# Altium PCB PCB1.PcbDoc
Units mm, origin at the board's own origin, x right, y up, seen from the top; angles counter-clockwise.
Board outline 100 x 50 mm, 2 copper layers (Top Layer, Bottom Layer); 69 components, 53 nets, 216 pads, 70 vias.
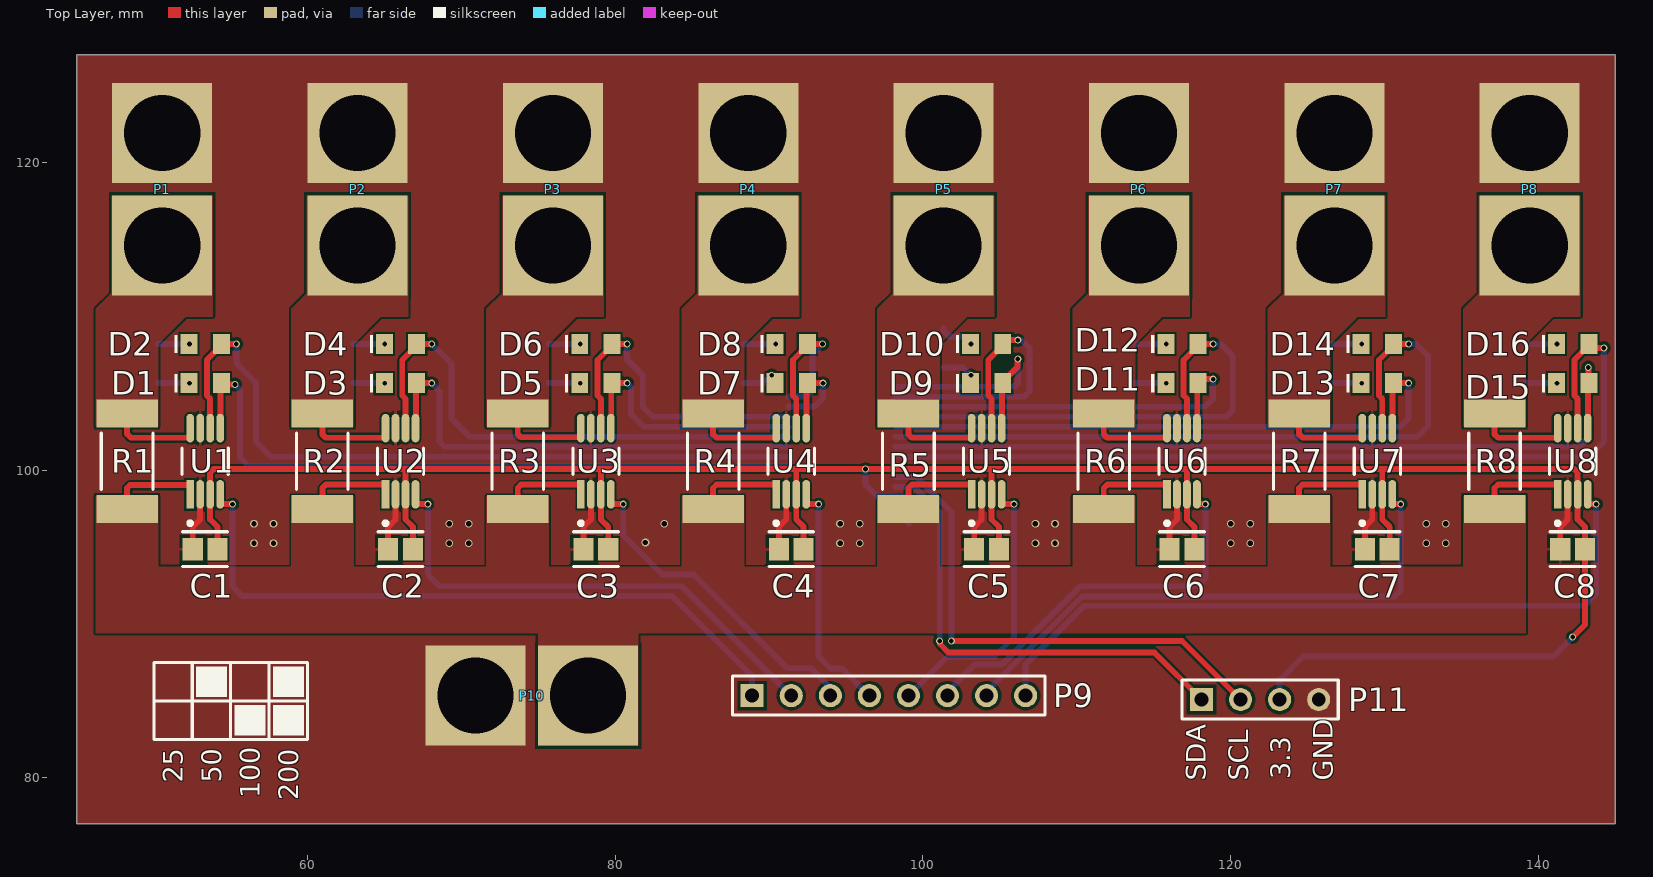
[diagram p0: Top Layer view]
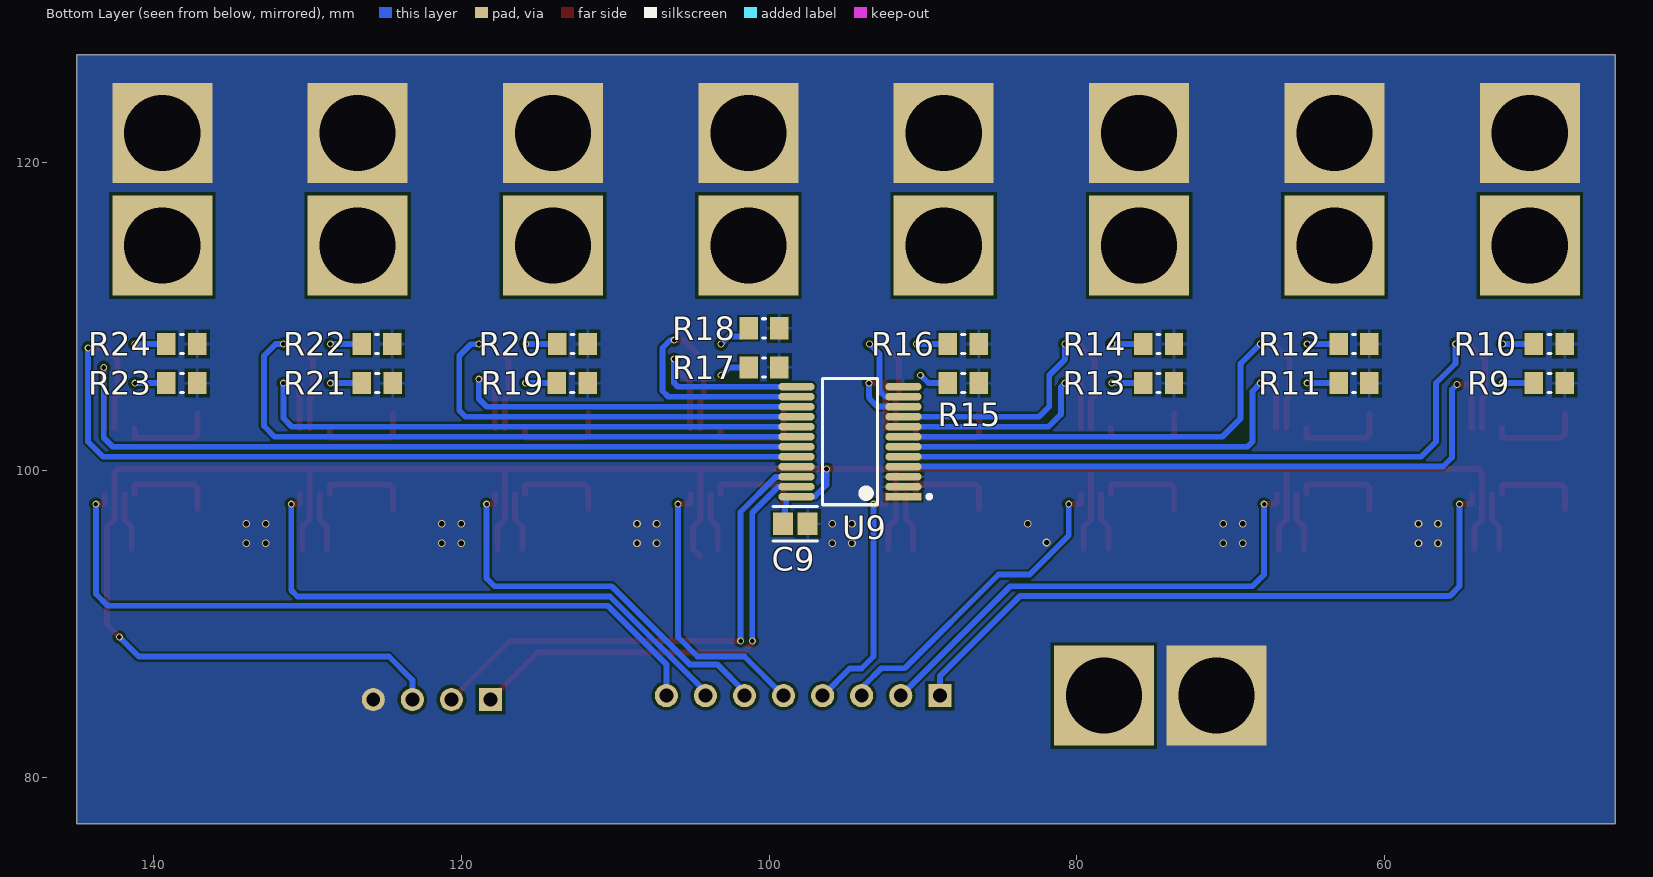
[diagram p1: Bottom Layer view, seen from below]
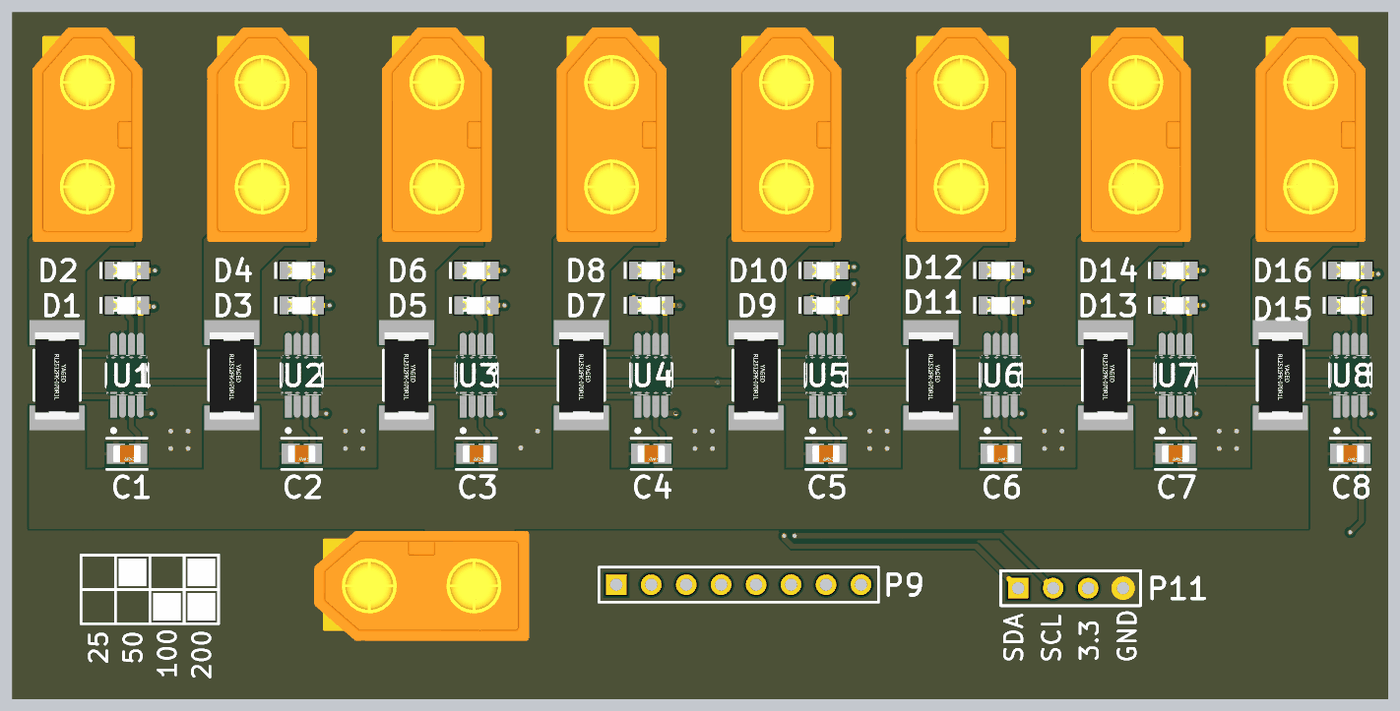
[diagram p2: 3D render of the assembled board from above, using the file's embedded part models]
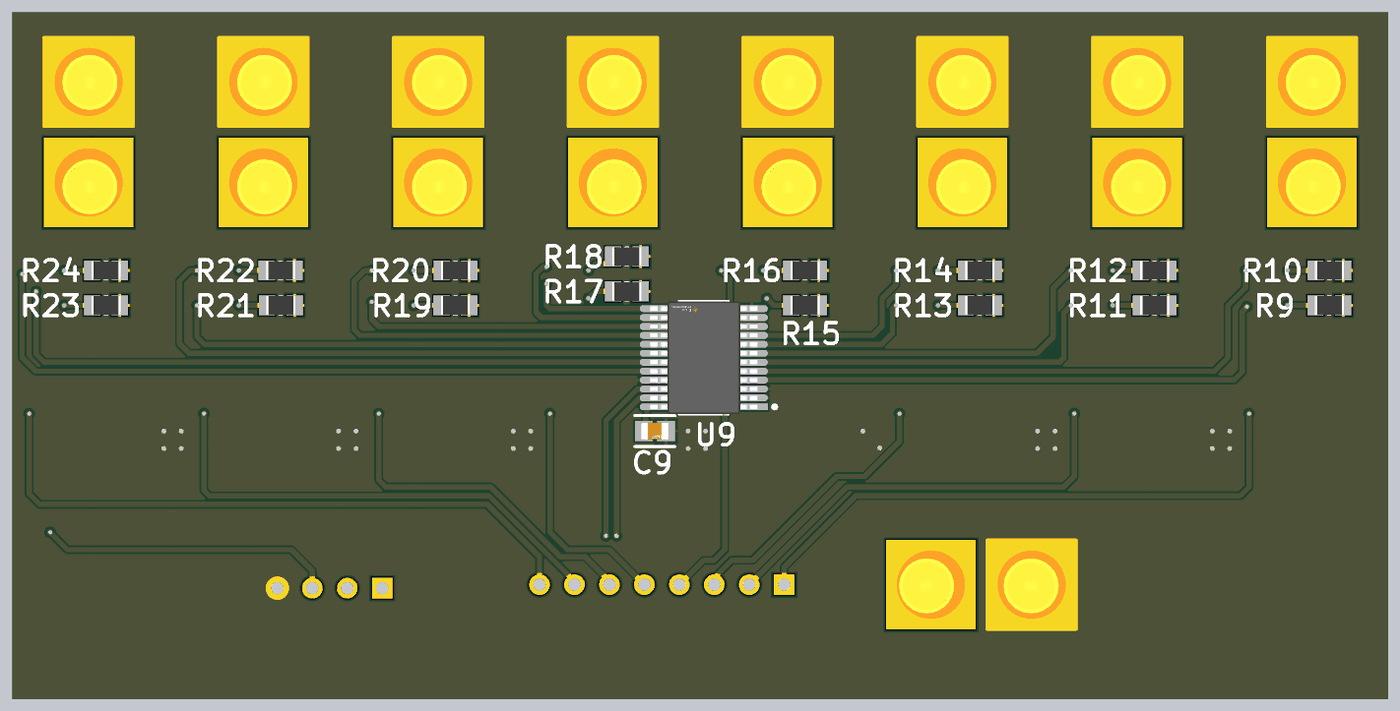
[diagram p3: 3D render of the assembled board from below, using the file's embedded part models]

## Layer stack, top to bottom
Top Solder: solder mask 0.0102, Solder Resist, Dk 3.5
Top Layer: signal copper 0.0356
Dielectric 1: dielectric 0.32, FR-4, Dk 4.8
Bottom Layer: signal copper 0.0356
Bottom Solder: solder mask 0.0102, Solder Resist, Dk 3.5

## Board outline
45,77 45,127 145,127 145,77

## Design rules (kind name [scope] priority, off if disabled: settings)
Clearance Clearance_POWER [(InNet('NetC205_2') OR InNet('NETC203_2') OR InNet('NETC206_2') OR InNet('NetP410_1') OR InNet('NetP410_3') OR InNet('VM'))] p1: gap=0.254 ignorepadtopadclearanceinfootprint=FALSE except(0: SMDPad-Hole THPad-Hole Via-Hole Fill-Hole Poly-Hole Region-Hole Text-Hole; 0.1: Arc-Arc Arc-Track Track-Track; 0.127: Arc-THPad Arc-Fill Arc-Poly Arc-Region Track-THPad Track-Fill Track-Poly Track-Region SMDPad-SMDPad; 0.2: Arc-SMDPad Track-SMDPad; 0.5: THPad-THPad THPad-Fill THPad-Poly THPad-Region Fill-Fill Fill-Poly Fill-Region Poly-Poly Poly-Region Region-Region)
Clearance [All] p2: gap=0.127 ignorepadtopadclearanceinfootprint=FALSE except(0: SMDPad-Hole THPad-Hole Via-Hole Fill-Hole Poly-Hole Region-Hole Text-Hole; 0.1: Arc-Arc Arc-Track Track-Track; 0.2: Arc-SMDPad Track-SMDPad THPad-Fill THPad-Poly THPad-Region Via-Fill Via-Poly Via-Region; 0.254: Arc-Via Arc-Text Arc-Hole Track-Via Track-Text Track-Hole SMDPad-THPad SMDPad-Via SMDPad-Text THPad-Via THPad-Text Via-Via Via-Text Fill-Text Poly-Text Region-Text Text-Text; 0.5: THPad-THPad)
ComponentClearance [All] p1: gap=0.127 collisioncheckmode=3 verticalgap=0.254 showdistances=FALSE
HoleSize [All] p1: absolutevalues=TRUE maxlimit=6.5 minlimit=0.025 maxpercent=80.000 minpercent=20.000
MinimumSolderMaskSliver [All] p1: minsoldermaskwidth=0.08
PlaneClearance [All] p1: clearance=0.2
PlaneConnect [All] p1: planeconnectstyle=Direct reliefexpansion=0.508 reliefentries=4 reliefconductorwidth=0.254 reliefairgap=0.254
PolygonConnect PolygonConnect_GND_POWER [InNet('GND') vs (HasFootprint('FP-FC-G-MFG') OR HasFootprint('FP-CL32-IPC_B') OR HasFootprint('TSON Advance_TOS') OR HasFootprint('XT60+MR60') OR HasFootprint('XT-60') OR HasFootprint('FP-SMAJ-CA-MFG') OR InNamedPolygon('GND_L01_P000'))] p1: connectstyle=Direct reliefconductorwidth=0.254 reliefentries=4 polygonreliefangle="90 Angle" airgapwidth=0.254
PolygonConnect PolygonConnect_GND [InNet('GND')] p2: thpad.connectstyle=Direct thpad.reliefconductorwidth=0.254 thpad.reliefentries=4 thpad.polygonreliefangle="90 Angle" thpad.airgapwidth=0.254 smdpad.connectstyle=Relief smdpad.reliefconductorwidth=0.2 smdpad.reliefentries=4 smdpad.polygonreliefangle="90 Angle" smdpad.airgapwidth=0.2 via.connectstyle=Direct via.reliefconductorwidth=0.254 via.reliefentries=4 via.polygonreliefangle="90 Angle" via.airgapwidth=0.254
PolygonConnect [All] p3: connectstyle=Direct reliefconductorwidth=0.254 reliefentries=4 polygonreliefangle="90 Angle" airgapwidth=0.254
RoutingVias [All] p1: holewidth=0.3 width=0.45 viastyle="Through Hole" minholewidth=0.3 minwidth=0.45 maxholewidth=0.55 maxwidth=0.7
SilkToSilkClearance [All] p1: silktosilkclearance=0
SilkToSolderMaskClearance [IsPad] p1: minsilkscreentomaskgap=0.15 clearancetoexposedcopper=TRUE
SolderMaskExpansion [All] p1: expansion=0.1 istentingtop=FALSE
Width Width_voltage [InNetClass('Voltage')] p1: maxlimit=0.5 minlimit=0.18 preferedwidth=0.18 minimp=50.000000 maximp=50.000000 favimp=50.000000
Width [All] p2: maxlimit=5.08 minlimit=0.127 preferedwidth=0.18 minimp=50.000000 maximp=50.000000 favimp=50.000000
23 further rules are at their usual default settings.

## Components (designator, comment, footprint, x,y, rotation, side; value= is the part's Value field where it differs from the comment)
C1 "08051C104KAT2A" FP-0805-L_2_01_0_2-W_1_25-IPC_B 53.34,94.869 r0 top
C2 "08051C104KAT2A" FP-0805-L_2_01_0_2-W_1_25-IPC_B 66.04,94.869 r0 top
C3 "08051C104KAT2A" FP-0805-L_2_01_0_2-W_1_25-IPC_B 78.74,94.869 r0 top
C4 "08051C104KAT2A" FP-0805-L_2_01_0_2-W_1_25-IPC_B 91.44,94.869 r0 top
C5 "08051C104KAT2A" FP-0805-L_2_01_0_2-W_1_25-IPC_B 104.14,94.869 r0 top
C6 "08051C104KAT2A" FP-0805-L_2_01_0_2-W_1_25-IPC_B 116.84,94.869 r0 top
C7 "08051C104KAT2A" FP-0805-L_2_01_0_2-W_1_25-IPC_B 129.54,94.869 r0 top
C8 "08051C104KAT2A" FP-0805-L_2_01_0_2-W_1_25-IPC_B 142.24,94.869 r0 top
C9 "08051C104KAT2A" FP-0805-L_2_01_0_2-W_1_25-IPC_B 98.298,96.52 r180 bottom
D1 "150080SS75000" WL-SMCW_0805_150080xx75000 53.34,105.664 r0 top
D2 "150080SS75000" WL-SMCW_0805_150080xx75000 53.34,108.204 r0 top
D3 "150080SS75000" WL-SMCW_0805_150080xx75000 66.04,105.664 r0 top
D4 "150080SS75000" WL-SMCW_0805_150080xx75000 66.04,108.204 r0 top
D5 "150080SS75000" WL-SMCW_0805_150080xx75000 78.74,105.664 r0 top
D6 "150080SS75000" WL-SMCW_0805_150080xx75000 78.74,108.204 r0 top
D7 "150080SS75000" WL-SMCW_0805_150080xx75000 91.44,105.664 r0 top
D8 "150080SS75000" WL-SMCW_0805_150080xx75000 91.44,108.204 r0 top
D9 "150080SS75000" WL-SMCW_0805_150080xx75000 104.14,105.664 r0 top
D10 "150080SS75000" WL-SMCW_0805_150080xx75000 104.14,108.204 r0 top
D11 "150080SS75000" WL-SMCW_0805_150080xx75000 116.84,105.664 r0 top
D12 "150080SS75000" WL-SMCW_0805_150080xx75000 116.84,108.204 r0 top
D13 "150080SS75000" WL-SMCW_0805_150080xx75000 129.54,105.664 r0 top
D14 "150080SS75000" WL-SMCW_0805_150080xx75000 129.54,108.204 r0 top
D15 "150080SS75000" WL-SMCW_0805_150080xx75000 142.24,105.664 r0 top
D16 "150080SS75000" WL-SMCW_0805_150080xx75000 142.24,108.204 r0 top
P1 "XT-60 Connector" 2 54.585,110.211 r90 top
P2 "XT-60 Connector" 2 67.285,110.211 r90 top
P3 "XT-60 Connector" 2 79.985,110.211 r90 top
P4 "XT-60 Connector" 2 92.685,110.211 r90 top
P5 "XT-60 Connector" 2 105.385,110.211 r90 top
P6 "XT-60 Connector" 2 118.085,110.211 r90 top
P7 "XT-60 Connector" 2 130.785,110.211 r90 top
P8 "XT-60 Connector" 2 143.485,110.211 r90 top
P9 "Header 8" HDR1X8 88.9,85.344 r0 top
P10 "XT-60 Connector" 2 82.626,89.383 r180 top
P11 "Header 4" HDR1X4 118.11,85.09 r0 top
R1 "RL2512FK-070R1L" FP-RL2512-MFG 48.26,100.584 r270 top value=100mΩ
R2 "RL2512FK-070R1L" FP-RL2512-MFG 60.96,100.584 r270 top value=100mΩ
R3 "RL2512FK-070R1L" FP-RL2512-MFG 73.66,100.584 r270 top value=100mΩ
R4 "RL2512FK-070R1L" FP-RL2512-MFG 86.36,100.584 r270 top value=100mΩ
R5 "RL2512FK-070R1L" FP-RL2512-MFG 99.06,100.584 r270 top value=100mΩ
R6 "RL2512FK-070R1L" FP-RL2512-MFG 111.76,100.584 r270 top value=100mΩ
R7 "RL2512FK-070R1L" FP-RL2512-MFG 124.46,100.584 r270 top value=100mΩ
R8 "RL2512FK-070R1L" FP-RL2512-MFG 137.16,100.584 r270 top value=100mΩ
R9 "1K" RESC2013X60X35ML10T20 49.276,105.664 r0 bottom
R10 "1K" RESC2013X60X35ML10T20 49.276,108.204 r0 bottom
R11 "1K" RESC2013X60X35ML10T20 61.976,105.664 r0 bottom
R12 "1K" RESC2013X60X35ML10T20 61.976,108.204 r0 bottom
R13 "1K" RESC2013X60X35ML10T20 74.676,105.664 r0 bottom
R14 "1K" RESC2013X60X35ML10T20 74.676,108.204 r0 bottom
R15 "1K" RESC2013X60X35ML10T20 87.376,105.664 r0 bottom
R16 "1K" RESC2013X60X35ML10T20 87.376,108.204 r0 bottom
R17 "1K" RESC2013X60X35ML10T20 100.33,106.68 r0 bottom
R18 "1K" RESC2013X60X35ML10T20 100.33,109.22 r0 bottom
R19 "1K" RESC2013X60X35ML10T20 112.792,105.664 r0 bottom
R20 "1K" RESC2013X60X35ML10T20 112.776,108.204 r0 bottom
R21 "1K" RESC2013X60X35ML10T20 125.476,105.664 r0 bottom
R22 "1K" RESC2013X60X35ML10T20 125.492,108.204 r0 bottom
R23 "1K" RESC2013X60X35ML10T20 138.176,105.664 r0 bottom
R24 "1K" RESC2013X60X35ML10T20 138.176,108.204 r0 bottom
U1 "INA225AIDGKT" FP-INA225AIDGKT-IPC_A 53.34,100.584 r90 top
U2 "INA225AIDGKT" FP-INA225AIDGKT-IPC_A 66.04,100.584 r90 top
U3 "INA225AIDGKT" FP-INA225AIDGKT-IPC_A 78.74,100.584 r90 top
U4 "INA225AIDGKT" FP-INA225AIDGKT-IPC_A 91.44,100.584 r90 top
U5 "INA225AIDGKT" FP-INA225AIDGKT-IPC_A 104.14,100.584 r90 top
U6 "INA225AIDGKT" FP-INA225AIDGKT-IPC_A 116.84,100.584 r90 top
U7 "INA225AIDGKT" FP-INA225AIDGKT-IPC_A 129.54,100.584 r90 top
U8 "INA225AIDGKT" FP-INA225AIDGKT-IPC_A 142.24,100.584 r90 top
U9 "TCA9555DBR" FP-DB0024A-IPC_A 94.742,101.854 r0 bottom

## Footprints (in the part's own frame and the unit in brackets; to place one, negate y for a bottom-side part, rotate by r counter-clockwise, add the part's x,y. Pads: shape width x height; smd on the part's side, far side on the other; paste and mask are expansions set on the pad)
2 [mm] "Battery Connector"
  rect 6.5x6.5 hole 4.95: 1(4.394,4.039) 2(11.709,4.039)
  body extent 0.07,0.13 15.67,8.13, height 16.4
FP-0805-L_2_01_0_2-W_1_25-IPC_B [mm]
  rect 1.305x1.456 smd paste+0 mask+0: 1(-0.806,0) 2(0.806,0)
  silkscreen extent -1.46,-1.13 1.46,1.13, body extent -1.71,-0.98 1.71,0.98, height 0.25
FP-DB0024A-IPC_A [mm]
  rect 2.353x0.495 smd paste+0 mask+0: 1(-3.475,3.575)
  rrect100% 2.353x0.495 smd paste+0 mask+0: 2(-3.475,2.925) 3(-3.475,2.275) 4(-3.475,1.625) 5(-3.475,0.975) 6(-3.475,0.325) 7(-3.475,-0.325) 8(-3.475,-0.975) 9(-3.475,-1.625) 10(-3.475,-2.275) 11(-3.475,-2.925) 12(-3.475,-3.575) 13(3.475,-3.575) 14(3.475,-2.925) 15(3.475,-2.275) 16(3.475,-1.625) 17(3.475,-0.975) 18(3.475,-0.325) 19(3.475,0.325) 20(3.475,0.975) 21(3.475,1.625) 22(3.475,2.275) 23(3.475,2.925) 24(3.475,3.575)
  silkscreen extent -5.28,-4.1 1.8,4.1, body extent -3.9,-4.1 3.9,4.1, height 2
FP-INA225AIDGKT-IPC_A [mm]
  rect 1.857x0.498 smd paste+0 mask+0: 1(-2.151,0.975)
  rrect100% 1.857x0.498 smd paste+0 mask+0: 2(-2.151,0.325) 3(-2.151,-0.325) 4(-2.151,-0.975) 5(2.151,-0.975) 6(2.151,-0.325) 7(2.151,0.325) 8(2.151,0.975)
  silkscreen extent -4.15,-1.5 0.85,1.5, body extent -3.58,-2 3.58,2, height 0.25
FP-RL2512-MFG [mm]
  rect 1.8x4 smd paste+0 mask+0: 1(-3.1,0) 2(3.1,0)
  silkscreen extent -1.83,-1.68 1.83,1.68, body extent -4.1,-2.1 4.1,2.1, height 0.25
HDR1X4 [mm] "Connector; Header; 4 Position"
  rect 1.5x1.5 hole 0.9: 1(0,0)
  round 1.5 hole 0.9: 2(2.54,0) 3(5.08,0) 4(7.62,0)
  silkscreen extent -1.27,-1.27 8.89,1.27
HDR1X8 [mm] "Connector; Header; 8 Position"
  rect 1.5x1.5 hole 0.9: 1(0,0)
  round 1.5 hole 0.9: 2(2.54,0) 3(5.08,0) 4(7.62,0) 5(10.16,0) 6(12.7,0) 7(15.24,0) 8(17.78,0)
  silkscreen extent -1.27,-1.27 19.05,1.27
RESC2013X60X35ML10T20 [mm] "Chip Resistor, 2-Leads, Body 2.1x1.35mm, IPC Low Density"
  rect 1.2x1.45 smd: 1(-1,0) 2(1,0)
  silkscreen extent -0.1,-0.63 0.1,0.63, body extent -1.05,-0.68 1.05,0.67, height 0.6
WL-SMCW_0805_150080xx75000 [mm] "SMD Mono-color Chip LED, body 2.0x1.25mm"
  rect 1.1x1.3 smd: 1(-1.05,0) 2(1.05,0)
  silkscreen extent -2,-0.6 -1.8,0.6, body extent -1,-0.63 1,0.62, height 0.7

## Part data
C1 C2 C3 C4 C5 C6 C7 C8 C9: library part CMP-2007-04174-2, "General Purpose Ceramic Capacitor, 0805, 100nF, 10%, X7R, 15%, 100V", Capacitance=100nF, Case Code (Imperial)=0805, Case Code (Metric)=2012, Dielectric=X7R, Dielectric Material=Ceramic, Max Operating Temperature=125°C, Min Operating Temperature=-55°C, Package Quantity=2000, Tolerance=10%, Voltage=100V, Case/Package=0805, Construction=Flat, Contact Plating=Tin, Depth=1.25mm, Height=1.4mm, Lead Free="Lead Free", Length=2.01mm, Mount="Surface Mount", Number of Pins=2, Packaging="Tape and Reel", Radiation Hardening=No, REACH SVHC="No SVHC", RoHS Compliant=Yes, Series=-, Termination=SMD/SMT, Thickness=0.055inch, Voltage Rating=100V, Voltage Rating (DC)=100V, Width=0.049inch
D1 D2 D3 D4 D5 D6 D7 D8 D9 D10 D11 D12 D13 D14 D15 D16: library part CMP-1426-00010-3, Case Code (Imperial)=0805, Case Code (Metric)=2012, Color=Red, Forward Current=100mA, Forward Voltage=1.9V, Max Junction Temperature (Tj)=95°C, Max Operating Temperature=85°C, Max Reverse Voltage (DC)=5V, Min Operating Temperature=-40°C, Power Dissipation=72mW, Test Current=20mA, Case/Package=0805, Dominant Wavelength=630nm, Height=700µm, Length=2mm, Lens Style="Clear, Rectangular", Luminous Intensity=60mcd, Mount="Surface Mount", NexarPartId=29717782, Packaging="Tape and Reel", Peak Wavelength=645nm, REACH SVHC=Unknown, Reverse Voltage=5V, RoHS=Compliant, Viewing Angle=140°, Wavelength=630nm, Width=1.25mm
P1 P2 P3 P4 P5 P6 P7 P8 P10: Colour=yellow, Manufacturer=POLOLU, Manufacturer Part Number="XT60 YELLOW", Maximum current=65A, Category="Power Supply Modules", ComponentLink1Description=http://static.tme.eu/products_pics/8/b/5/8b5040a8a5baf3e0e67386c2e3a9b903/913.jpg, ComponentLink1URL=http://static.tme.eu/products_pics/8/b/5/8b5040a8a5baf3e0e67386c2e3a9b903/913.jpg, Information="Product is not a working device, but only component", MinAmount=1, Multiples=1, Number of Pins=2, Price Type=NET, Pricing 1="1=2.08, 10=1.95 (USD)", Stock 1=29, SuppliedAmount=0, Supplier 1=TME, Supplier Part Number 1="XT-60 Connector", Type of robotics accessories="power connector", Unit=pcs, Weight=7.267
P9: "Header, 8-Pin", LatestRevisionDate=17-Jul-2002, LatestRevisionNote="Re-released for DXP Platform.", Publisher="Altium Limited"
P11: "Header, 4-Pin", LatestRevisionDate=17-Jul-2002, LatestRevisionNote="Re-released for DXP Platform.", Publisher="Altium Limited"
R1 R2 R3 R4 R5 R6 R7 R8: library part CMP-03412-013102-1, "RES 0.1 OHM 1% 1W 2512", Manufacturer=YAGEO, Package=RL2512, Power Rating=1W, Resistance=100mΩ, Temperature="-55°C to +155°C", Temperature Coefficient=600ppm/°C, Temperature Range High=+155°C, Temperature Range Low=-55°C, Tolerance=1%, Automotive=Yes, Automotive Grade="Grade 0", Category=Res, ComponentLink2Description=Datasheet, ComponentLink2URL=http://www.yageo.com/documents/recent/PYu-RL_Group_521_RoHS_L_2.pdf, Composition="Thick Film", Device Class L1="Passive Components", Device Class L2=Resistors, Device Class L3="Chip SMD Resistors", Digikey Description="RES 0.1 OHM 1% 1W 2512", Footprint Url=http://www.yageo.com/exep/pages/download/literatures/PYu-R_Mount_10.pdf, Height=0.65mm, Ipc Land Pattern Name=RESC635320X55, Lead Free=Yes, Manufacturer Part Number=RL2512FK-070R1L, Mouser Description="Current Sense Resistors 0.1ohm 1% 1W", Octopart=https://octopart.com/rl2512fk-070r1l-yageo-42334369, RoHS=TRUE, Series=RL
R9 R10 R11 R12 R13 R14 R15 R16 R17 R18 R19 R20 R21 R22 R23 R24: library part CMP-2100-03671-1, "Chip Resistor, 1 KOhm, +/- 1%, 125 mW, -55 to 155 degC, 0805 (2012 Metric), RoHS, Tape and Reel", Case Code (Imperial)=0805, Case Code (Metric)=2012, Manufacturer=Yageo, Max Operating Temperature=155degC, Max Power Dissipation=125mW, Min Operating Temperature=-55degC, Package Description="2-Pin Surface Mounted Device, Body 2 x 1.25 mm", Package Quantity=1, Resistance=1KOhm, Temperature Coefficient=100ppm/degreesC, Tolerance=1%, Voltage Rating=150V, Case/Package=0805, Composition=ThickFilm, Datasheet URL=http://www.yageo.com/NewPortal/yageodocoutput?fileName=/pdf/R-Chip/PYu-RC_Group_51_RoHS_L_5.pdf, Datasheet Version="Rev. 5, 10/2016", Depth=1.25mm, Height=0.024inch, Lead Free=LeadFree, Length=0.079inch, Manufacturer URL=http://www.yageo.com/, Military Standard=Not, Number of Pins=2, Number of Terminations=2, Package Reference=0805, Packaging=TapeandReel, Power Rating=125mW, REACH SVHC=Unknown, RoHSCompliant=true, Termination=SMD/SMT, Voltage Rating (DC)=150V, Width=0.049inch
U1 U2 U3 U4 U5 U6 U7 U8: library part CMP-04895-000038-1, "IC MONITOR PWR/CUR BIDIR 8VSSOP", Ambient Temperature Range High=+125°C, Ambient Temperature Range Low=-40°C, Input Bias Current=72uA, Input Offset Voltage=0.075mV, Manufacturer="Texas Instruments", Max Junction Temp=+150°C, Max Supply Voltage=36V, Min Supply Voltage=2.7V, Nominal Supply Current=300uA, Package=VSSOP8, Temperature="-40°C to +125°C", Voltage Gain=0.025/0.05/0.1/0.2V/mV, Automotive=No, Bandwidth=250kHz, Category=IC, ComponentLink2Description=Datasheet, ComponentLink2URL=http://www.ti.com/lit/ds/symlink/ina225.pdf, Device Class L1="Integrated Circuits (ICs)", Device Class L2="Linear ICs", Device Class L3=Instrumentation, Digikey Description="IC MONITOR PWR/CUR BIDIR 8VSSOP", Height=1.1mm, Ipc Land Pattern Name=SOIC65P490X110-8, Lead Free=Yes, Manufacturer Part Number=INA225AIDGKT, Mouser Description="Current Sense Amplifiers 36V Bidir 0-Drift Ser Crnt-Shunt Mon", Number Of Channels=1, Octopart=https://octopart.com/ina225aidgkt-texas+instruments-28946314, RoHS=TRUE, Standoff Height=0.05mm, Temperature Range High=+125°C, Temperature Range Low=-40°C
U9: library part CMP-04886-000014-1, "IC I/O EXPANDER 16B 24SSOP", Case/Package=SSOP, Max Operating Temperature=85°C, Max Supply Voltage=5.5V, Min Operating Temperature=-40°C, Min Supply Voltage=1.65V, Interface=I2C, Lead Free="Lead Free", Number of I/Os=16, Number of Pins=24, Packaging="Cut Tape", RoHS Compliant=Yes

## Via types
v1: diameter 0.45, hole 0.3, Top Layer to Bottom Layer, tented both sides, 44 vias
v2: diameter 0.5, hole 0.35, Top Layer to Bottom Layer, tented both sides, 26 vias

## Nets (pads, with @x,y where several pads share a name; then routed paths per layer and width w, separated by ;. In a path a pad name is that pad's centre, name@x,y a point inside that pad or via, vN(x,y) a via of type N, cw(c..) or ccw(c..) an arc to the next point about the centre after c; other vN are vias at no path point)
+3.3: C1.2 C2.2 C3.2 C4.2 C5.2 C6.2 C7.2 C8.2 C9.1 P11.3 U1.3 U2.3 U3.3 U4.3 U5.3 U6.3 U7.3 U8.3 U9.24 | length 166
  Top Layer w0.381: C1.2 54.146,96.318 53.665,96.799 U1.3 53.665,99.853 53.888,100.076 66.441,100.076 ; C2.2 66.846,96.318 66.365,96.799 U2.3 66.365,100 66.441,100.076 ; C3.2 79.546,96.318 79.065,96.799 U3.3 79.065,100.005 78.994,100.076 ; C4.2 92.246,96.318 91.765,96.799 U4.3 91.765,100.005 91.694,100.076 ; U5.3@104.454,98.433 104.465,98.423 104.465,96.799 104.946,96.318 C5.2 C5.2@104.484,94.407 ; U5.3 104.465,100.005 104.394,100.076 ; C6.2 117.646,96.318 117.165,96.799 U6.3 117.165,100.005 117.094,100.076 ; C7.2 130.346,96.318 129.865,96.799 U7.3 129.865,100.005 129.794,100.076 ; v1(142.24,89.154) 143.046,89.96 C8.2 143.046,96.318 142.565,96.799 U8.3 142.565,99.853 142.342,100.076 129.794,100.076 ; 66.441,100.076 78.994,100.076 ; 78.994,100.076 91.694,100.076 ; 91.694,100.076 v1(96.266,100.076) 104.394,100.076 ; 104.394,100.076 117.094,100.076 ; 117.094,100.076 129.794,100.076
  Bottom Layer w0.381: v1(96.266,100.076) 96.266,99.049 97.024,98.291 98.205,98.291 U9.24 98.835,98.279 98.887,98.226 98.887,97.683 98.974,97.596 98.974,96.65 C9.1 ; P11.3 123.19,86.36 124.714,87.884 140.97,87.884 v1(142.24,89.154)
GND: C1.1 C2.1 C3.1 C4.1 C5.1 C6.1 C7.1 C8.1 C9.2 P1.2 P2.2 P3.2 P4.2 P5.2 P6.2 P7.2 P8.2 P10.2 P11.4 R9.1 R10.1 R11.1 R12.1 R13.1 R14.1 R15.1 R16.1 R17.1 R18.1 R19.1 R20.1 R21.1 R22.1 R23.1 R24.1 U1.2 U1.7 U2.2 U2.7 U3.2 U3.7 U4.2 U4.7 U5.2 U5.7 U6.2 U6.7 U7.2 U7.7 U8.2 U8.7 U9.2 U9.3 U9.12 U9.21 | length 30.1
  Top Layer w0.381: C1.1 52.534,96.318 53.015,96.799 U1.2 ; C2.1 65.234,96.318 65.715,96.799 U2.2 ; C3.1 77.934,96.318 78.415,96.799 U3.2 ; C4.1 90.634,96.318 91.115,96.799 U4.2 ; C5.1 103.334,96.318 103.815,96.799 U5.2 ; C6.1 116.034,96.318 116.515,96.799 U6.2 ; C7.1 128.734,96.318 129.215,96.799 U7.2 ; C8.1 141.434,96.318 141.915,96.799 U8.2
  other v2: 56.515,95.25 57.785,95.25 69.215,95.25 70.485,95.25 94.615,95.25 95.885,95.25 107.315,95.25 108.585,95.25 120.015,95.25 121.285,95.25 132.715,95.25 133.985,95.25 81.962,95.297 56.515,96.52 57.785,96.52 69.215,96.52 70.485,96.52 83.185,96.52 94.615,96.52 95.885,96.52 107.315,96.52 108.585,96.52 120.015,96.52 121.285,96.52 132.715,96.52 133.985,96.52
GS1.1: D1.2 U1.5 U9.4 | length 44.7
  Top Layer w0.381: U1.5 54.337,102.757 54.337,105.611 D1.2 54.482,105.572 v1(55.28,105.572)
  Bottom Layer w0.381: v1(55.28,105.572) 55.604,105.248 55.604,100.83 56.192,100.241 91.255,100.241 U9.4
GS1.2: D2.2 U1.6 U9.5 | length 48.8
  Top Layer w0.381: U1.6 53.665,104.637 53.449,104.852 53.449,107.163 54.39,108.104 D2.2 v1(55.372,108.204)
  Bottom Layer w0.381: v1(55.372,108.204) 55.372,106.934 56.642,105.664 56.642,101.854 57.617,100.879 U9.5
GS2.1: D3.2 U2.5 U9.6 | length 30.8
  Top Layer w0.381: U2.5 67.037,102.757 67.037,105.611 D3.2 v1(68.072,105.664)
  Bottom Layer w0.381: v1(68.072,105.664) 68.072,105.645 68.58,105.137 68.58,101.854 68.905,101.529 U9.6
GS2.2: D4.2 U2.6 U9.7 | length 34.7
  Top Layer w0.381: U2.6 66.365,104.637 66.149,104.852 66.149,107.163 67.09,108.104 D4.2 v1(68.072,108.204)
  Bottom Layer w0.381: v1(68.072,108.204) 69.342,106.934 69.342,103.378 70.541,102.179 U9.7
GS3.1: D5.2 U3.5 U9.8 | length 16.7
  Top Layer w0.381: U3.5 79.737,102.757 79.737,105.611 D5.2 v1(80.772,105.664)
  Bottom Layer w0.381: v1(80.772,105.664) 80.772,105.66 81.026,105.406 81.026,103.632 81.829,102.829 U9.8
GS3.2: D6.2 U3.6 U9.9 | length 21.2
  Top Layer w0.381: U3.6 79.065,104.637 78.849,104.852 78.849,107.163 79.79,108.104 D6.2 v1(80.772,108.204)
  Bottom Layer w0.381: v1(80.772,108.204) 80.772,107.188 81.788,106.172 81.788,104.14 82.449,103.479 U9.9
GS4.1: D7.2 U4.5 U9.10 | length 7.4
  Top Layer w0.381: U4.5 92.437,102.757 92.437,105.611 D7.2 v1(93.503,105.664)
  Bottom Layer w0.381: U9.10 91.279,104.141 92.965,104.141 93.459,104.635 93.459,104.677 93.503,104.721 v1(93.503,105.664)
GS4.2: D8.2 U4.6 U9.11 | length 12
  Top Layer w0.381: U4.6 91.765,104.637 91.549,104.852 91.549,107.163 92.49,108.104 D8.2 v1(93.472,108.204)
  Bottom Layer w0.381: U9.11 91.279,104.791 92.46,104.791 92.834,105.165 92.834,107.566 v1(93.472,108.204)
GS5.1: D9.2 U5.5 U9.13 | length 14.5
  Top Layer w0.381: U5.5 105.137,102.757 105.137,105.711 106.159,106.733 106.159,107.213 v1(106.172,107.227)
  Bottom Layer w0.381: U9.13 105.937,105.429 106.172,105.664 v1(106.172,107.227)
GS5.2: D10.2 U5.6 U9.14 | length 19.6
  Top Layer w0.381: U5.6 104.465,104.637 104.249,104.852 104.249,107.163 105.544,108.458 v1(106.172,108.458)
  Bottom Layer w0.381: U9.14 106.557,104.779 106.934,105.156 106.934,107.95 106.439,108.445 106.185,108.445 v1(106.172,108.458)
GS6.1: D11.2 U6.5 U9.15 | length 26.2
  Top Layer w0.381: U6.5 117.837,102.757 117.837,105.611 D11.2 118.144,105.918 v1(118.872,105.918)
  Bottom Layer w0.381: U9.15 118.353,104.129 118.872,104.648 v1(118.872,105.918)
GS6.2: D12.2 U6.6 U9.16 | length 34.1
  Top Layer w0.381: U6.6 117.165,104.637 116.949,104.852 116.949,107.163 117.99,108.204 v1(118.872,108.204)
  Bottom Layer w0.381: U9.16 119.735,103.479 120.142,103.886 120.142,107.442 119.393,108.191 118.885,108.191 v1(118.872,108.204)
GS7.1: D13.2 U7.5 U9.17 | length 39.8
  Top Layer w0.381: U7.5 130.537,102.757 130.537,105.611 D13.2 v1(131.572,105.664)
  Bottom Layer w0.381: U9.17 131.023,102.829 131.572,103.378 v1(131.572,105.664)
GS7.2: D14.2 U7.6 U9.18 | length 48
  Top Layer w0.381: U7.6 129.865,104.637 129.649,104.852 129.649,107.163 130.59,108.104 D14.2 v1(131.572,108.204)
  Bottom Layer w0.381: U9.18 132.151,102.179 132.842,102.87 132.842,107.442 132.08,108.204 v1(131.572,108.204)
GS8.1: D15.2 U8.5 U9.19 | length 53.8
  Top Layer w0.381: U8.5 143.237,102.757 143.237,105.611 143.269,105.643 143.269,106.667 v1(143.256,106.68)
  Bottom Layer w0.381: U9.19 142.677,101.529 143.256,102.108 v1(143.256,106.68)
GS8.2: D16.2 U8.6 U9.20 | length 59.4
  Top Layer w0.381: U8.6 142.565,104.637 142.349,104.852 142.349,107.163 143.29,108.104 143.448,107.946 v1(144.272,107.946)
  Bottom Layer w0.381: U9.20 143.297,100.879 144.272,101.854 v1(144.272,107.946)
NetD1_1: D1.1 R9.2 | length 2
  Bottom Layer w0.381: R9.2 v1(52.324,105.664)
NetD2_1: D2.1 R10.2 | length 2
  Bottom Layer w0.381: R10.2 v1(52.324,108.204)
NetD3_1: D3.1 R11.2 | length 2
  Bottom Layer w0.381: R11.2 v1(65.024,105.664)
NetD4_1: D4.1 R12.2 | length 2
  Bottom Layer w0.381: R12.2 v1(65.024,108.204)
NetD5_1: D5.1 R13.2 | length 2
  Bottom Layer w0.381: R13.2 v1(77.724,105.664)
NetD6_1: D6.1 R14.2 | length 2
  Bottom Layer w0.381: R14.2 v1(77.724,108.204)
NetD7_1: D7.1 R15.2 | length 2
  Bottom Layer w0.381: R15.2 89.643,105.664 90.151,106.172 v1(90.17,106.172)
NetD8_1: D8.1 R16.2 | length 2
  Bottom Layer w0.381: R16.2 v1(90.424,108.204)
NetD9_1: D9.1 R17.2 | length 2
  Bottom Layer w0.381: R17.2 102.597,106.68 103.105,106.172 v1(103.124,106.172)
NetD10_1: D10.1 R18.2 | length 2.3
  Bottom Layer w0.381: R18.2 101.33,109.095 101.74,108.686 102.624,108.686 103.105,108.204 v1(103.124,108.204)
NetD11_1: D11.1 R19.2 | length 2
  Bottom Layer w0.381: R19.2 v1(115.824,105.664)
NetD12_1: D12.1 R20.2 | length 2
  Bottom Layer w0.381: R20.2 v1(115.824,108.204)
NetD13_1: D13.1 R21.2 | length 2
  Bottom Layer w0.381: R21.2 v1(128.524,105.664)
NetD14_1: D14.1 R22.2 | length 2
  Bottom Layer w0.381: R22.2 v1(128.524,108.204)
NetD15_1: D15.1 R23.2 | length 2
  Bottom Layer w0.381: R23.2 v1(141.224,105.664)
NetD16_1: D16.1 R24.2 | length 2
  Bottom Layer w0.381: R24.2 v1(141.224,108.204)
NetP1_1: P1.1 R1.1 U1.8 | length 6.1
  Top Layer w0.381: R1.1 48.26,102.362 48.514,102.108 52.311,102.108 52.365,102.162 U1.8
NetP2_1: P2.1 R2.1 U2.8 | length 6.1
  Top Layer w0.381: R2.1 60.96,102.331 61.183,102.108 65.011,102.108 65.065,102.162 U2.8
NetP3_1: P3.1 R3.1 U3.8 | length 6.1
  Top Layer w0.381: R3.1 73.66,102.331 73.852,102.139 77.711,102.139 77.765,102.193 U3.8
NetP4_1: P4.1 R4.1 U4.8 | length 6.1
  Top Layer w0.381: R4.1 86.36,102.331 86.583,102.108 90.411,102.108 90.465,102.162 U4.8
NetP5_1: P5.1 R5.1 U5.8 | length 6.1
  Top Layer w0.381: R5.1 99.06,102.331 99.283,102.108 103.111,102.108 103.165,102.162 U5.8
NetP6_1: P6.1 R6.1 U6.8 | length 6.1
  Top Layer w0.381: R6.1 111.76,102.331 111.983,102.108 115.811,102.108 115.865,102.162 U6.8
NetP7_1: P7.1 R7.1 U7.8 | length 6.1
  Top Layer w0.381: R7.1 124.46,102.331 124.683,102.108 128.511,102.108 128.565,102.162 U7.8
NetP8_1: P8.1 R8.1 U8.8 | length 6.1
  Top Layer w0.381: R8.1 137.16,102.331 137.383,102.108 141.211,102.108 141.265,102.162 U8.8
OUT1: P9.1 U1.4 | length 44.2
  Top Layer w0.381: U1.4 54.315,97.857 54.369,97.803 55.105,97.803 v1(55.118,97.79)
  Bottom Layer w0.381: v1(55.118,97.79) 55.118,92.456 55.76,91.814 83.7,91.814 88.9,86.614 P9.1
OUT2: P9.2 U2.4 | length 32.9
  Top Layer w0.381: U2.4 67.015,97.857 67.069,97.803 67.805,97.803 v1(67.818,97.79)
  Bottom Layer w0.381: v1(67.818,97.79) 67.818,93.218 68.58,92.456 84.328,92.456 P9.2
OUT3: P9.3 U3.4 | length 21.5
  Top Layer w0.381: U3.4 79.715,97.857 79.769,97.803 80.505,97.803 v1(80.518,97.79)
  Bottom Layer w0.381: v1(80.518,97.79) 80.518,95.758 83.058,93.218 85.09,93.218 91.186,87.122 92.71,87.122 93.766,86.066 93.766,85.558 P9.3
OUT4: P9.4 U4.4 | length 15.7
  Top Layer w0.381: U4.4 92.415,97.857 92.469,97.803 93.205,97.803 v1(93.218,97.79)
  Bottom Layer w0.381: v1(93.218,97.79) 93.218,87.884 93.987,87.115 94.749,87.115 P9.4
OUT5: P9.5 U5.4 | length 18.5
  Top Layer w0.381: U5.4 105.115,97.857 105.169,97.803 105.905,97.803 v1(105.918,97.79)
  Bottom Layer w0.381: P9.5 101.6,87.884 104.648,87.884 105.918,89.154 v1(105.918,97.79)
OUT6: P9.6 U6.4 | length 26
  Top Layer w0.381: U6.4 117.815,97.857 117.869,97.803 118.351,97.803 v1(118.364,97.79)
  Bottom Layer w0.381: P9.6 101.6,85.598 103.378,87.376 105.156,87.376 110.236,92.456 117.856,92.456 118.364,92.964 v1(118.364,97.79)
OUT7: P9.7 U7.4 | length 36.7
  Top Layer w0.381: U7.4 130.515,97.857 130.569,97.803 131.051,97.803 v1(131.064,97.79)
  Bottom Layer w0.381: P9.7 104.14,85.598 110.336,91.794 130.656,91.794 131.064,92.202 v1(131.064,97.79)
OUT8: P9.8 U8.4 | length 48
  Top Layer w0.381: U8.4 143.215,97.857 143.269,97.803 143.751,97.803 v1(143.764,97.79)
  Bottom Layer w0.381: P9.8 106.68,87.376 110.49,91.186 143.002,91.186 143.764,91.948 v1(143.764,97.79)
SCL: P11.2 U9.22 | length 33.3
  Top Layer w0.381: v1(101.854,88.9) 116.84,88.9 P11.2
  Bottom Layer w0.381: U9.22 98.229,99.567 99.569,99.567 101.854,97.282 v1(101.854,88.9)
SDA: P11.1 U9.23 | length 30.6
  Top Layer w0.381: v1(101.092,88.9) 101.105,88.887 101.105,88.702 101.669,88.138 115.062,88.138 P11.1
  Bottom Layer w0.381: U9.23 98.229,98.917 99.41,98.917 101.092,97.235 v1(101.092,88.9)
VCC: P10.1 R1.2 R2.2 R3.2 R4.2 R5.2 R6.2 R7.2 R8.2 U1.1 U2.1 U3.1 U4.1 U5.1 U6.1 U7.1 U8.1 | length 49.1
  Top Layer w0.381: R1.2 48.26,98.837 48.452,99.029 52.307,99.029 52.365,98.971 U1.1 ; R2.2 60.96,98.837 61.183,99.06 65.007,99.06 65.065,99.002 U2.1 ; R3.2 73.66,98.837 73.883,99.06 77.707,99.06 77.765,99.002 U3.1 ; R4.2 86.36,98.837 86.583,99.06 90.407,99.06 90.465,99.002 U4.1 ; R5.2 99.06,98.837 99.283,99.06 103.107,99.06 103.165,99.002 U5.1 ; R6.2 111.76,98.837 111.983,99.06 115.807,99.06 115.865,99.002 U6.1 ; R7.2 124.46,98.837 124.683,99.06 128.507,99.06 128.565,99.002 U7.1 ; R8.2 137.16,98.837 137.383,99.06 141.207,99.06 141.265,99.002 U8.1
pads on no net: U9.1

## Polygon pours and split planes (outlines as drawn)
GND on Top Layer "GND_L01_P018" (solid, pour order 18): 145,77 45,77 45,127 145,127
VCC on Top Layer "VCC_L01_P016" (solid, pour order 16): 46.228,93.726 139.192,93.726 139.192,89.408 46.228,89.408
VCC on Top Layer "VCC_L01_P017" (solid, pour order 17): 74.983,82.094 81.482,82.094 81.482,90.323 81.471,90.333 74.991,90.333 74.979,90.321
VCC on Top Layer "VCC_L01_P015" (solid, pour order 15): 135.128,98.298 139.192,98.298 139.192,91.186 135.128,91.186
VCC on Top Layer "VCC_L01_P014" (solid, pour order 14): 122.428,98.298 126.492,98.298 126.492,91.186 122.428,91.186
VCC on Top Layer "VCC_L01_P013" (solid, pour order 13): 109.728,98.298 113.792,98.298 113.792,91.186 109.728,91.186
VCC on Top Layer "VCC_L01_P012" (solid, pour order 12): 97.028,98.298 101.092,98.298 101.092,91.186 97.028,91.186
VCC on Top Layer "VCC_L01_P011" (solid, pour order 11): 84.328,98.298 88.392,98.298 88.392,91.186 84.328,91.186
VCC on Top Layer "VCC_L01_P010" (solid, pour order 10): 71.628,98.298 75.692,98.298 75.692,91.186 71.628,91.186
VCC on Top Layer "VCC_L01_P009" (solid, pour order 9): 58.928,98.298 62.992,98.298 62.992,91.186 58.928,91.186
VCC on Top Layer "VCC_L01_P008" (solid, pour order 8): 46.228,98.298 50.292,98.298 50.292,91.186 46.228,91.186
NetP5_1 on Top Layer "NETP5_1_L01_P007" (solid, pour order 7): 98.044,117.856 98.044,111.506 97.028,110.49 97.028,102.87 101.092,102.87 101.092,108.204 102.87,109.982 104.648,109.982 104.648,117.856
NetP8_1 on Top Layer "NETP8_1_L01_P006" (solid, pour order 6): 136.144,117.856 136.144,111.506 135.128,110.49 135.128,102.87 139.192,102.87 139.192,108.204 140.97,109.982 142.748,109.982 142.748,117.856
NetP7_1 on Top Layer "NETP7_1_L01_P005" (solid, pour order 5): 123.444,117.856 123.444,111.506 122.428,110.49 122.428,102.87 126.492,102.87 126.492,108.204 128.27,109.982 130.048,109.982 130.048,117.856
NetP6_1 on Top Layer "NETP6_1_L01_P004" (solid, pour order 4): 110.744,117.856 110.744,111.506 109.728,110.49 109.728,102.87 113.792,102.87 113.792,108.204 115.57,109.982 117.348,109.982 117.348,117.856
NetP4_1 on Top Layer "NETP4_1_L01_P003" (solid, pour order 3): 85.344,117.856 85.344,111.506 84.328,110.49 84.328,102.87 88.392,102.87 88.392,108.204 90.17,109.982 91.948,109.982 91.948,117.856
NetP3_1 on Top Layer "NETP3_1_L01_P002" (solid, pour order 2): 72.644,117.856 72.644,111.506 71.628,110.49 71.628,102.87 75.692,102.87 75.692,108.204 77.47,109.982 79.248,109.982 79.248,117.856
NetP2_1 on Top Layer "NETP2_1_L01_P001" (solid, pour order 1): 59.944,117.856 59.944,111.506 58.928,110.49 58.928,102.87 62.992,102.87 62.992,108.204 64.77,109.982 66.548,109.982 66.548,117.856
NetP1_1 on Top Layer "NETP1_1_L01_P000" (solid, pour order 0): 47.244,117.856 47.244,111.506 46.228,110.49 46.228,102.87 50.292,102.87 50.292,108.204 52.07,109.982 53.848,109.982 53.848,117.856
GND on Bottom Layer "GND_L02_P020" (solid, pour order 20): 145,77 45,77 45,127 145,127

## Silkscreen, mask and mechanical layers (free items; w line width, h text height)
Top Overlay:
  rectangle: 57.75,85.25 59.75,87.25
  rectangle: 57.75,82.75 59.75,84.75
  rectangle: 55.25,82.75 57.25,84.75
  rectangle: 52.75,85.25 54.75,87.25
  lines w0.2: 50,85 52.5,85 ; 50,85 50,87.5 52.5,87.5 ; 50,85 52.5,85 ; 50,85 50,82.5 52.5,82.5 ; 52.5,82.5 52.5,85 ; 52.5,82.5 55,82.5 ; 52.5,82.5 52.5,85 ; 52.5,85 52.5,87.5 ; 52.5,85 55,85 ; 52.5,85 52.5,87.5 ; 52.5,85 55,85 ; 52.5,87.5 55,87.5 ; 55,82.5 55,85 ; 55,82.5 57.5,82.5 ; 55,82.5 55,85 ; 55,85 55,87.5 ; 55,85 57.5,85 ; 55,85 55,87.5 ; 55,85 57.5,85 ; 55,87.5 57.5,87.5 ; 57.5,82.5 57.5,85 ; 57.5,82.5 60,82.5 60,85 ; 57.5,82.5 57.5,85 ; 57.5,85 60,85 ; 57.5,85 57.5,87.5 ; 57.5,85 57.5,87.5 ; 57.5,85 60,85 ; 57.5,87.5 60,87.5 60,85
  text "3.3" at 123.885,79.913 h1.27 r90
  text "SDA" at 118.385,79.807 h1.27 r90
  text "SCL" at 121.135,79.807 h1.27 r90
  text "GND" at 126.635,79.807 h1.27 r90
  text "25" at 51.885,79.692 h1.27 r90
  text "50" at 54.385,79.692 h1.27 r90
  text "100" at 56.885,78.663 h1.27 r90
  text "200" at 59.385,78.557 h1.27 r90
Mechanical 1:
  the board outline again, w0.2